# Altium PCB ICwT.PcbDoc (part 1 of 4)
Units mm, origin at the board's own origin, x right, y up, seen from the top; angles counter-clockwise.
Board outline 132 x 99.5 mm, 2 copper layers (Top Layer, Bottom Layer); 241 components, 265 nets, 1108 pads, 443 vias.
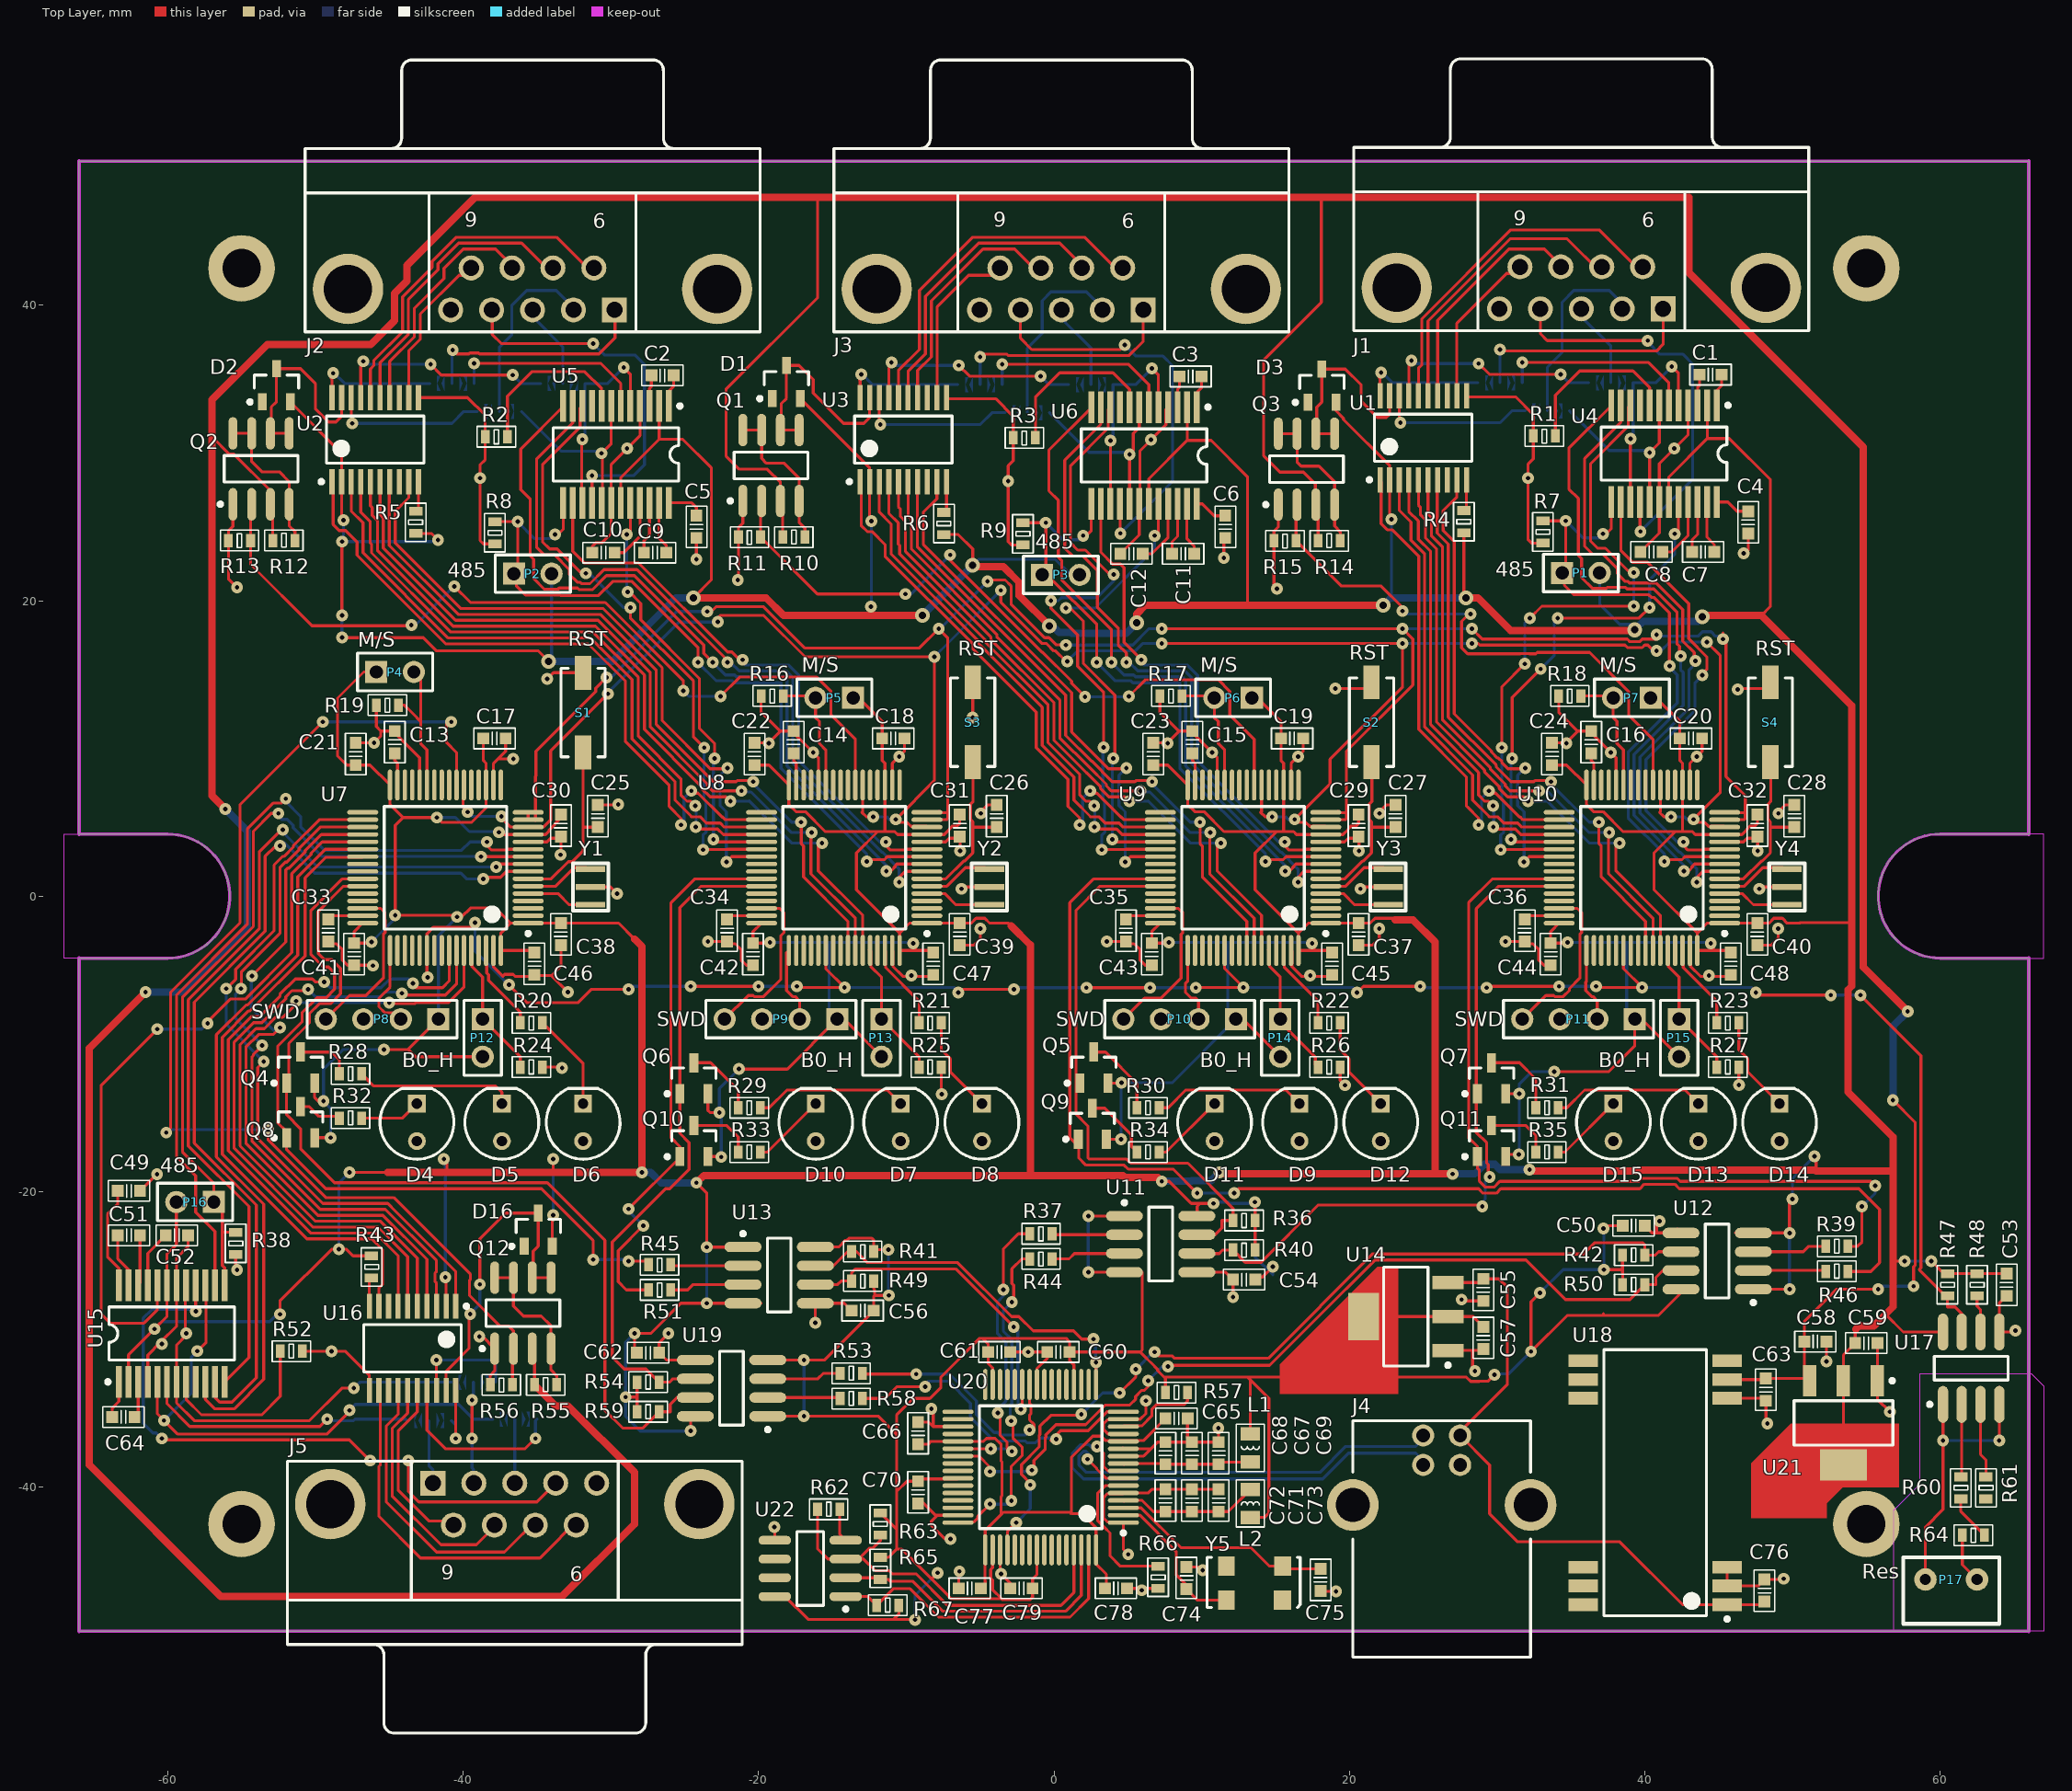
[diagram p0: Top Layer view]
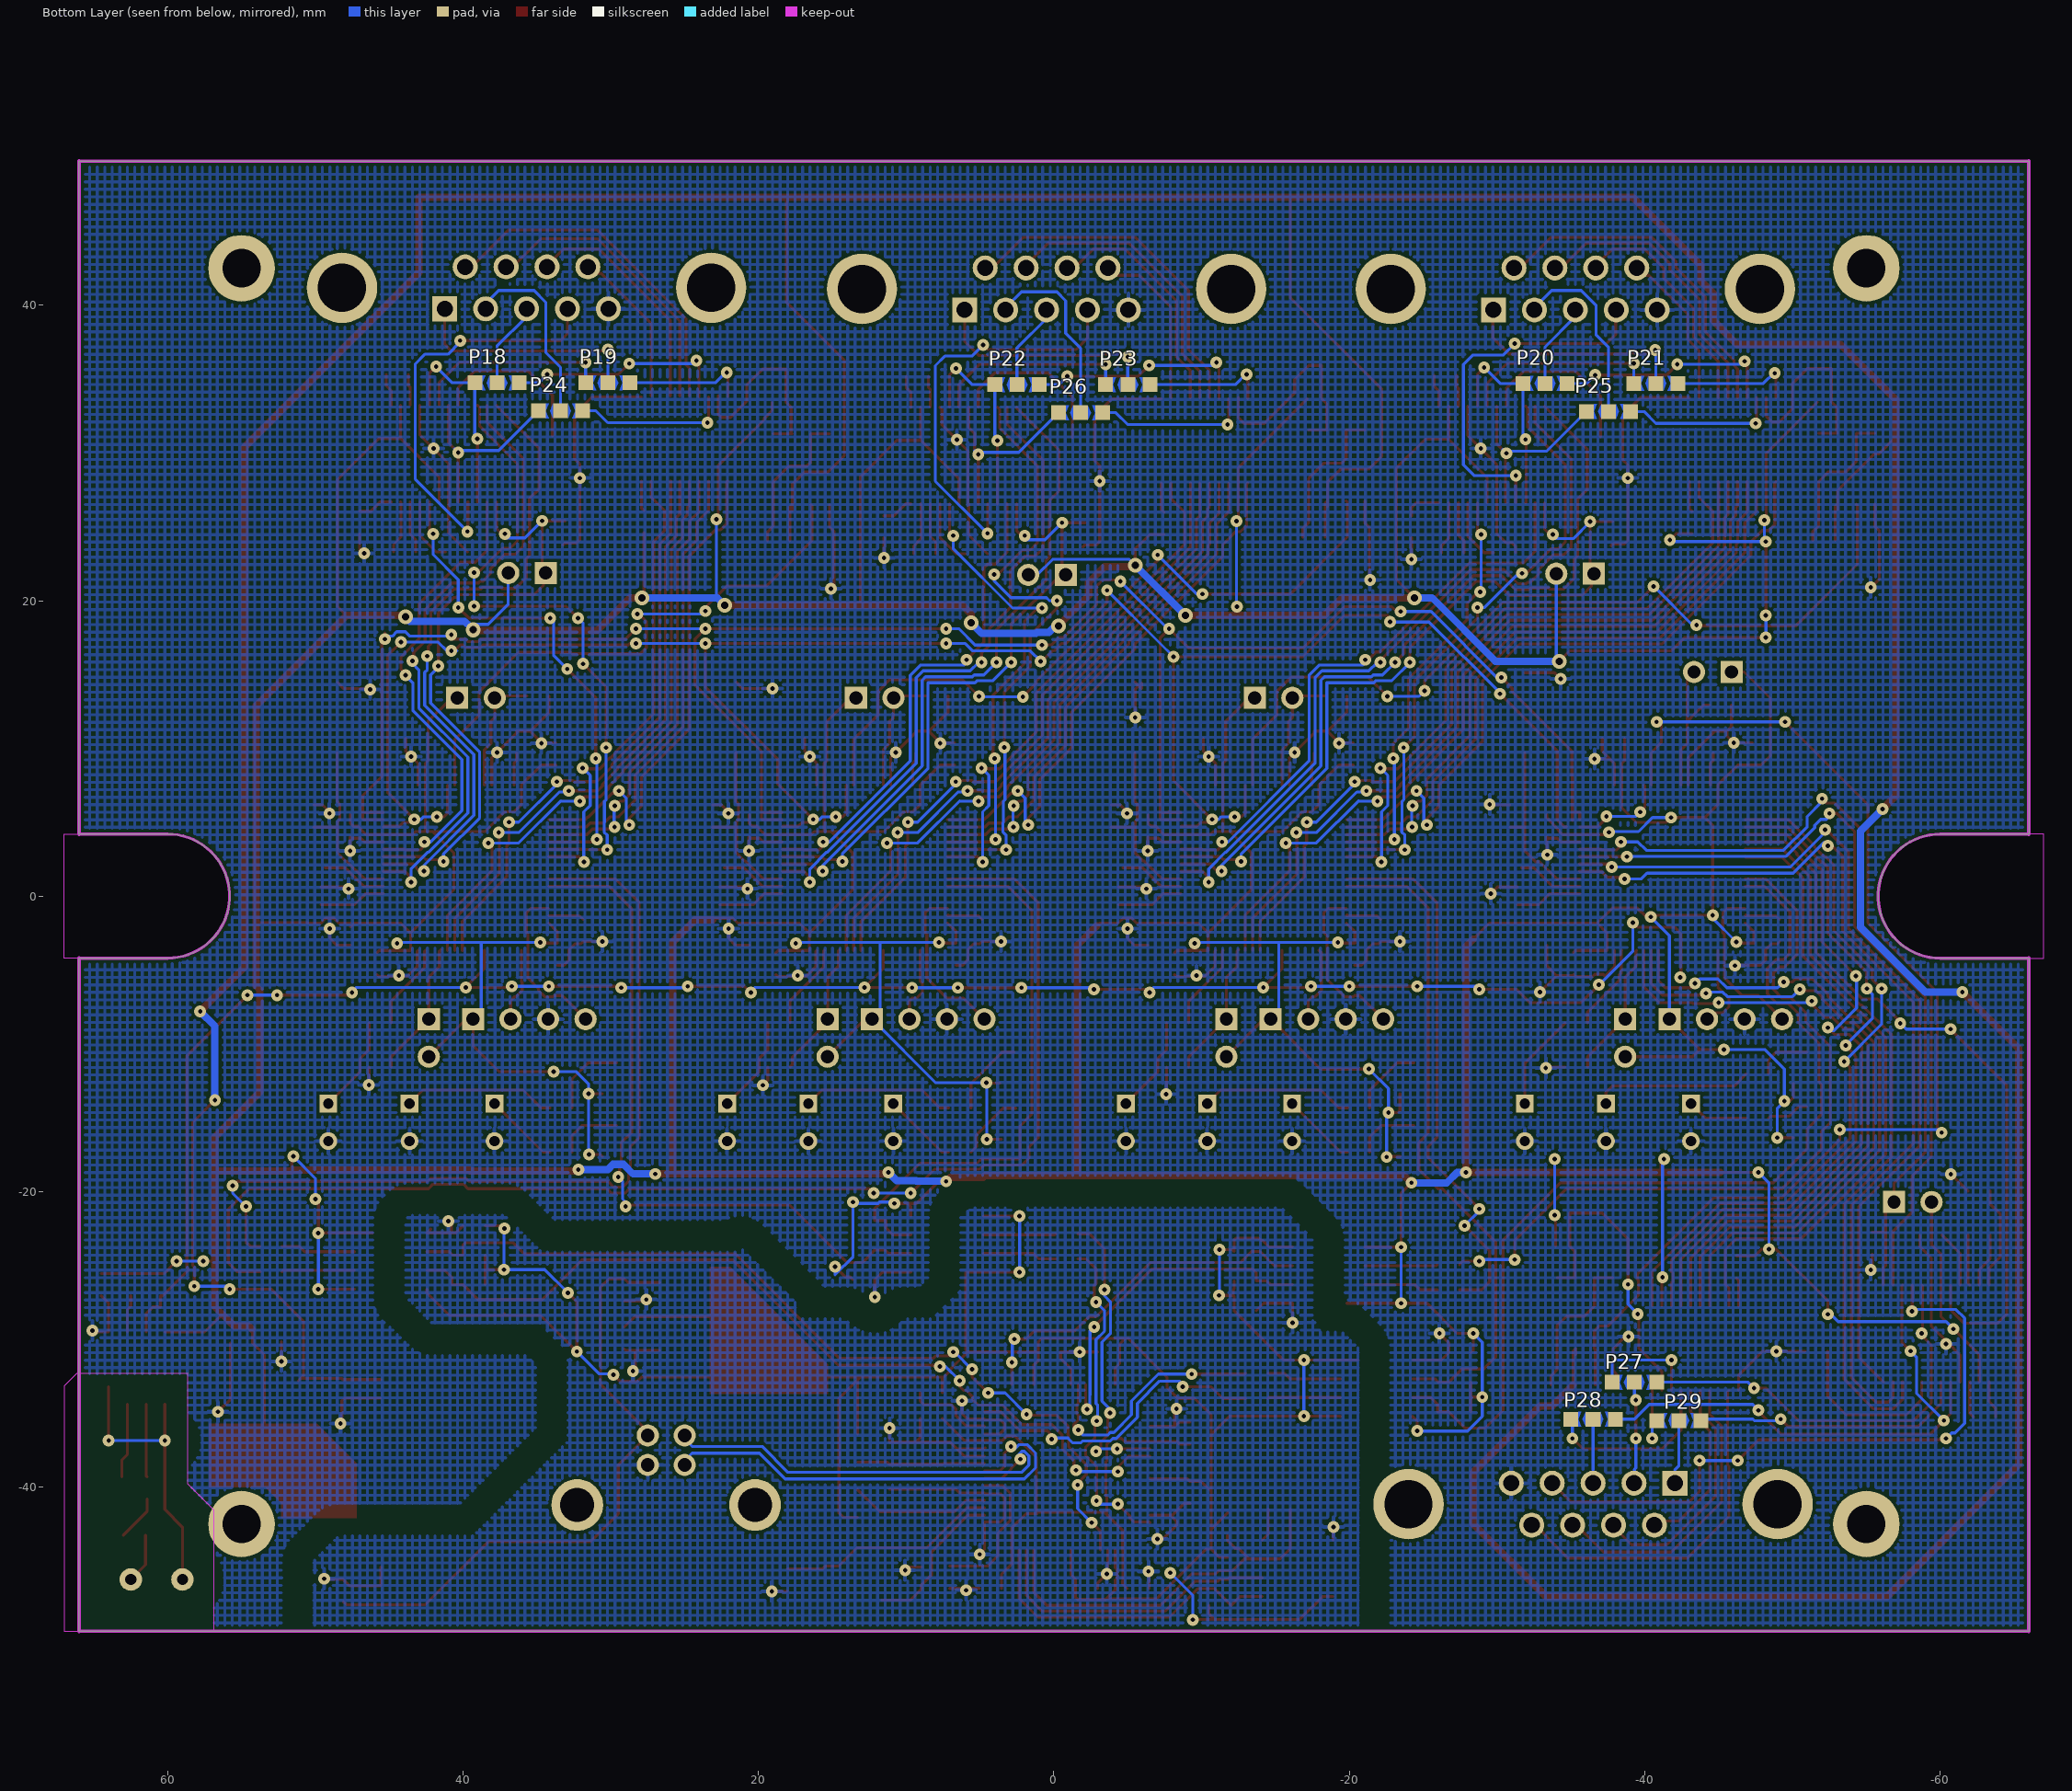
[diagram p1: Bottom Layer view, seen from below]
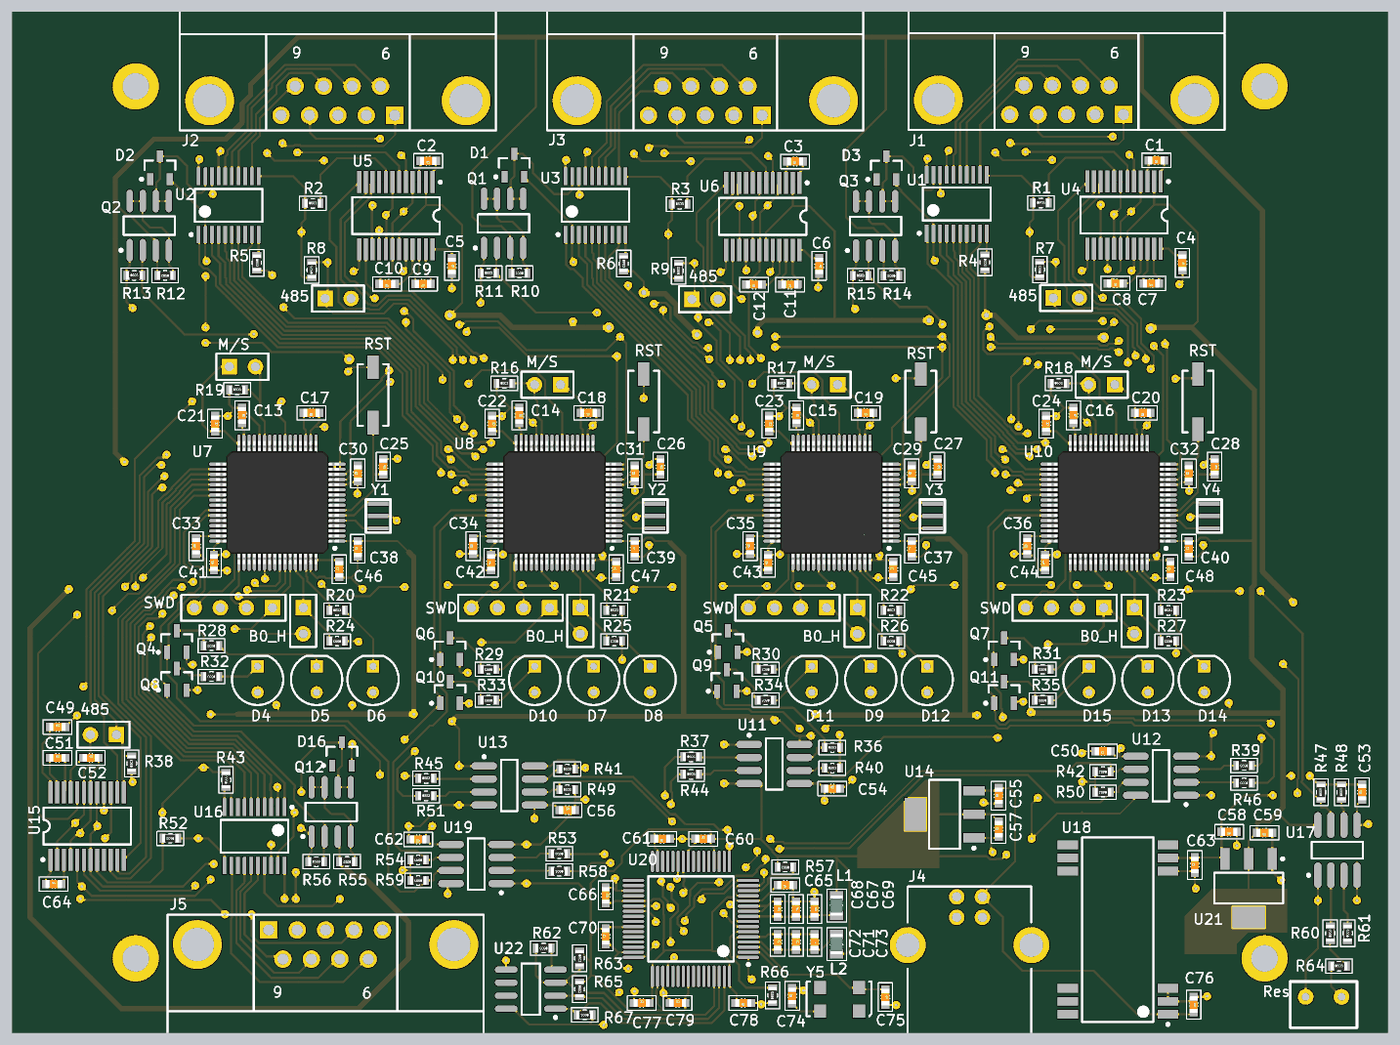
[diagram p5: 3D render of the assembled board from above, using the file's embedded part models]

## Layer stack, top to bottom
Top Solder: solder mask 0.0102, Solder Resist, Dk 3.5
Top Layer: signal copper 0.0356
Dielectric1: core 0.32, FR-4, Dk 4.8
Bottom Layer: signal copper 0.0356
Bottom Solder: solder mask 0.0102, Solder Resist, Dk 3.5

## Board outline
-66,-49.75 -66,-4.2 -60,-4.2 ccw(c-60,0) -60,4.2 -66,4.2 -66,49.75 66,49.75 66,4.2 60,4.2 60.007,4.208 ccw(c60.007,0.008) 60.007,-4.192 60,-4.2 66,-4.2 66,-49.75
cut-out: -67,-4.2 -67,4.2 -60,4.2 cw(c-60,0) -60,-4.2
cut-out: 60,-4.2 67,-4.2 67,4.2 60,4.2 60.007,4.208 ccw(c60.007,0.008)

## Design rules (kind name [scope] priority, off if disabled: settings)
Clearance Clearance_1 [InNetClass('USB_all') vs InNetClass('STM_all')] p1: gap=2
Clearance [All] p2: gap=0.2
ComponentClearance [All] p1: gap=0.254 collisioncheckmode=3 verticalgap=0.254 showdistances=TRUE
DiffPairsRouting [All] p1: maxlimit=0.254 minlimit=0.2 mostfreqgap=0.254 toplayer_minwidth=0.2 toplayer_maxwidth=0.381 toplayer_prefwidth=0.2 bottomlayer_minwidth=0.2 bottomlayer_maxwidth=0.381 bottomlayer_prefwidth=0.2 maxuncoupledlength=12.7
HoleSize [All] p1: absolutevalues=TRUE maxlimit=5 minlimit=0.025 maxpercent=80.000 minpercent=20.000
MinimumSolderMaskSliver [InComponent('U2_External_iface1','U2_External_iface2','U2_External_iface3','U2_External_iface4','U3_External_iface1','U3_External_iface2','U3_External_iface3','U3_External_iface4') vs InComponent('U2_External_iface1','U2_External_iface2','U2_External_iface3','U2_External_iface4','U3_External_iface1','U3_External_iface2','U3_External_iface3','U3_External_iface4')] p1: minsoldermaskwidth=0
MinimumSolderMaskSliver MinimumSolderMaskSliver_1 [All] p2: minsoldermaskwidth=0.1
PolygonConnect [All] p1: connectstyle=Relief reliefconductorwidth=0.254 reliefentries=4 polygonreliefangle="90 Angle" airgapwidth=0.254
RoomDefinition External_iface3 [InComponentClass('External_iface3')] p1: confinementstyle=ConfineIn formatcopy=TRUE lockcomponents=FALSE outline -15.254,37.271 -15.254,56.379 16.254,56.379 16.254,37.271 12.679,37.271 12.679,26.846 10.929,26.846 10.929,25.121 10.454,25.121 10.454,16.925 -13.204,16.925 -13.204,26.571 -14.354,26.571 -14.354,37.271
RoomDefinition External_iface4 [InComponentClass('External_iface4')] p2: confinementstyle=ConfineIn formatcopy=TRUE lockcomponents=FALSE outline 19.95,37.396 19.95,56.504 51.458,56.504 51.458,37.396 47.883,37.396 47.883,26.971 46.133,26.971 46.133,25.246 45.658,25.246 45.658,17.05 22,17.05 22,26.696 20.85,26.696 20.85,37.396
RoomDefinition External_iface2 [InComponentClass('External_iface2')] p3: confinementstyle=ConfineIn formatcopy=TRUE lockcomponents=FALSE outline -51.004,37.346 -51.004,56.454 -19.496,56.454 -19.496,37.346 -23.071,37.346 -23.071,26.921 -24.821,26.921 -24.821,25.196 -25.296,25.196 -25.296,17 -48.954,17 -48.954,26.646 -50.104,26.646 -50.104,37.346
RoomDefinition STM322 [InComponentClass('STM322')] p4: confinementstyle=ConfineIn formatcopy=TRUE lockcomponents=FALSE outline -26.875,-19.075 -1.875,-19.075 -1.875,16.925 -26.875,16.925
RoomDefinition External_iface1 [InComponentClass('External_iface1')] p5: confinementstyle=ConfineIn formatcopy=TRUE lockcomponents=FALSE outline -69.625,-18.9 -69.625,-37.95 -39.425,-37.95 -39.425,-18.9
RoomDefinition STM323 [InComponentClass('STM323')] p6: confinementstyle=ConfineIn formatcopy=TRUE lockcomponents=FALSE outline 0.125,-19.075 25.125,-19.075 25.125,16.925 0.125,16.925
RoomDefinition ICwT_main [InComponentClass('ICwT_main')] p7: confinementstyle=ConfineIn formatcopy=TRUE lockcomponents=FALSE outline 30.6,-50 57.8,-50 57.8,-28.3 30.6,-28.3
RoomDefinition TX_2 [InComponentClass('TX_2')] p8: confinementstyle=ConfineIn formatcopy=TRUE lockcomponents=FALSE outline -3.675,-27.25 18.375,-27.25 18.375,-20.25 -3.675,-20.25
RoomDefinition STM321 [InComponentClass('STM321')] p9: confinementstyle=ConfineIn formatcopy=TRUE lockcomponents=FALSE outline -53.875,-19.075 -28.875,-19.075 -28.875,16.925 -53.875,16.925
RoomDefinition "Power selector1" [InComponentClass('Power selector1')] p10: confinementstyle=ConfineIn formatcopy=TRUE lockcomponents=FALSE outline -39.41,-35.825 -32.8,-35.825 -32.8,-20.325 -39.41,-20.325
RoomDefinition U_ICwT_ft4232 [InComponentClass('U_ICwT_ft4232')] p11 off: confinementstyle=ConfineIn formatcopy=TRUE lockcomponents=FALSE outline -66.5,-49.35 -57.5,-49.35 -57.5,-45.5 -66.5,-45.5
RoomDefinition TX_1 [InComponentClass('TX_1')] p12: confinementstyle=ConfineIn formatcopy=TRUE lockcomponents=FALSE outline -10.925,-29.6 -30.425,-29.6 -30.425,-36.6 -10.925,-36.6
RoomDefinition SYNC_dec [InComponentClass('SYNC_dec')] p13: confinementstyle=ConfineIn formatcopy=TRUE lockcomponents=FALSE outline 65.795,-42.85 65.795,-20.8 58.795,-20.8 58.795,-42.85
RoomDefinition STM324 [InComponentClass('STM324')] p14: confinementstyle=ConfineIn formatcopy=TRUE lockcomponents=FALSE outline 27.125,-19.075 52.125,-19.075 52.125,16.925 27.125,16.925
RoomDefinition RX_2 [InComponentClass('RX_2')] p15: confinementstyle=ConfineIn formatcopy=TRUE lockcomponents=FALSE outline 55.8,-21 33.75,-21 33.75,-28 55.8,-28
RoomDefinition RX_1 [InComponentClass('RX_1')] p16: confinementstyle=ConfineIn formatcopy=TRUE lockcomponents=FALSE outline -29.5,-29.35 -7.45,-29.35 -7.45,-22.35 -29.5,-22.35
RoomDefinition "Power selector4" [InComponentClass('Power selector4')] p17: confinementstyle=ConfineIn formatcopy=TRUE lockcomponents=FALSE outline 13.64,21.3 20.25,21.3 20.25,36.8 13.64,36.8
RoomDefinition "Power selector3" [InComponentClass('Power selector3')] p18: confinementstyle=ConfineIn formatcopy=TRUE lockcomponents=FALSE outline -22.61,21.55 -16,21.55 -16,37.05 -22.61,37.05
RoomDefinition "Power selector2" [InComponentClass('Power selector2')] p19: confinementstyle=ConfineIn formatcopy=TRUE lockcomponents=FALSE outline -57.135,21.325 -50.525,21.325 -50.525,36.825 -57.135,36.825
RoutingVias [All] p1: holewidth=0.3 width=0.8 viastyle="Through Hole" minholewidth=0.3 minwidth=0.8 maxholewidth=0.711 maxwidth=1.27
SilkToSilkClearance [All] p1: silktosilkclearance=0.1
SilkToSolderMaskClearance SilkscreenOverComponentPads [InComponent('Y1_STM321','Y1_STM322','Y1_STM323','Y1_STM324') vs InComponent('Y1_STM321','Y1_STM322','Y1_STM323','Y1_STM324')] p1: minsilkscreentomaskgap=0 clearancetoexposedcopper=TRUE
SilkToSolderMaskClearance SilkscreenOverComponentPads_1 [IsPad] p2: minsilkscreentomaskgap=0.1 clearancetoexposedcopper=TRUE
SolderMaskExpansion [All] p1: expansion=0.1
Width [All] p1: maxlimit=1 minlimit=0.2 preferedwidth=0.2
23 further rules are at their usual default settings.

## Classes and differential pairs
net class OP_side2: 3.3VDC_External_iface1 EXT_SYNC FT_RXD1 FT_RXD2 FT_RXD3 FT_RXD4 FT_VCC33 GND_STM321 NetR17_1 RXD1 RXD2 RXD3 RXD4 UGND
net class OP_side1: 3.3VDC_External_iface1 FT_TXD1 FT_TXD2 FT_TXD3 FT_TXD4 FT_VCC33 NetP1_1 NetR4_2 NetR7_1 NetR7_2 NetR8_2 NetR10_2 NetR15_2 NetR19_2 NetR23_2 NetR24_2 NetR25_2 NetR30_2 NetR31_2 TXD1 TXD2 TXD3 TXD4
net class USB_all: EECLK EECS EEDATA FT_RXD1 FT_RXD2 FT_RXD3 FT_RXD4 FT_TXD1 FT_TXD2 FT_TXD3 FT_TXD4 FT_VCC18 FT_VCC33 FT_VPHY FT_VPLL NetC2_1 NetC4_1 NetP1_1 NetP1_2 NetR2_2 NetR4_2 NetR6_1 NetR7_1 NetR11_1 NetU6_18 NetU6_19 NetU6_21 NetU6_22 NetU6_23 NetU6_24 NetU6_28 NetU6_29 NetU6_30 NetU6_32 NetU6_33 NetU6_34 NetU6_36 NetU6_40 NetU6_41 NetU6_43 NetU6_44 NetU6_45 NetU6_46 NetU6_53 NetU6_54 NetU6_55 NetU6_57 NetU6_58 NetU6_59 NetU6_60 NetU7_6 NetU7_7 NetU8_28 UGND USB_N USB_P VBUS
net class STM_all: 3.3VDC_External_iface1 /SHDN_External_iface1 /SHDN_External_iface2 /SHDN_External_iface3 /SHDN_External_iface4 A(RX+)_External_iface1 A(RX+)_External_iface2 A(RX+)_External_iface3 A(RX+)_External_iface4 B(RX-)_External_iface1 B(RX-)_External_iface2 B(RX-)_External_iface3 B(RX-)_External_iface4 CLK_GEN_STM321 CS0_EX_External_iface1 CS0_EX_External_iface2 CS0_EX_External_iface3 CS0_EX_External_iface4 CS0_External_iface1 CS0_External_iface2 CS0_External_iface3 CS0_External_iface4 CS1_EX_External_iface1 CS1_EX_External_iface2 CS1_EX_External_iface3 CS1_EX_External_iface4 CS1_External_iface1 CS1_External_iface2 CS1_External_iface3 CS1_External_iface4 CS2_EX_External_iface1 CS2_EX_External_iface2 CS2_EX_External_iface3 CS2_EX_External_iface4 CS2_External_iface1 CS2_External_iface2 CS2_External_iface3 CS2_External_iface4 DSUB1_External_iface1 DSUB1_External_iface2 DSUB1_External_iface3 DSUB1_External_iface4 DSUB2_External_iface1 DSUB2_External_iface2 DSUB2_External_iface3 DSUB2_External_iface4 EXT_SYNC FAST_External_iface1 FAST_External_iface2 FAST_External_iface3 FAST_External_iface4 GND_STM321 HDPLX_External_iface1 HDPLX_External_iface2 HDPLX_External_iface3 HDPLX_External_iface4 MISO_EX_External_iface1 MISO_EX_External_iface2 MISO_EX_External_iface3 MISO_EX_External_iface4 MISO_External_iface1 MISO_External_iface2 MISO_External_iface3 MISO_External_iface4 MOSI_EX_External_iface1 MOSI_EX_External_iface2 MOSI_EX_External_iface3 MOSI_EX_External_iface4 MOSI_External_iface1 MOSI_External_iface2 MOSI_External_iface3 MOSI_External_iface4 NetC16_1 NetC16_2 NetC28_1 NetC28_2 NetC29_1 NetC31_1 NetC44_2 NetC45_2 NetC46_2 NetC47_2 NetC60_2 NetC61_2 NetC62_2 NetC63_2 NetC68_1 NetC68_2 NetC69_1 NetC70_1 NetC70_2 NetC71_1 NetC72_1 NetC72_2 NetC73_1 NetC74_1 NetC75_1 NetC76_1 NetC77_1 NetC77_2 NetC78_1 NetC78_2 NetC79_1 NetC79_2 NetD1_3 NetD2_1 NetD3_1 NetD4_1 NetD5_1 NetD6_1 NetD7_1 NetD8_1 NetD9_1 NetD10_1 NetD11_1 NetD12_1 NetD13_1 NetD14_3 NetD15_3 NetD16_3 NetJ1_1 NetJ1_2 NetJ1_3 NetJ3_1 NetJ3_2 NetJ3_3 NetJ4_1 NetJ4_2 NetJ4_3 NetJ5_1 NetJ5_2 NetJ5_3 NetP3_1 NetP4_1 NetP5_1 NetP6_1 NetP11_2 NetP12_2 NetP13_2 NetP14_2 NetQ1_2 NetQ1_4 NetQ5_STM321_3 NetQ5_STM322_3 NetQ5_STM323_3 NetQ5_STM324_3 NetQ9_STM321_3 NetQ9_STM322_3 NetQ9_STM323_3 NetQ9_STM324_3 NetQ10_2 NetQ10_4 NetQ11_2 NetQ11_4 NetQ12_2 NetQ12_4 NetR16_2 NetR17_1 NetR22_1 NetR45_1 NetR46_1 NetR47_1 NetR48_1 NetR62_1 NetR63_1 NetR64_1 NetR65_2 NetR66_2 NetR67_2 NetU1_STM321_2 NetU1_STM321_3 NetU1_STM321_4 NetU1_STM321_20 NetU1_STM321_21 NetU1_STM321_24 NetU1_STM321_25 NetU1_STM321_26 NetU1_STM321_29 NetU1_STM321_30 NetU1_STM321_33 NetU1_STM321_40 NetU1_STM321_41 NetU1_STM321_44 NetU1_STM321_45 NetU1_STM321_50 NetU1_STM321_51 NetU1_STM321_52 NetU1_STM321_53 NetU1_STM321_55 NetU1_STM321_56 NetU1_STM321_61 NetU1_STM321_62 NetU1_STM322_2 NetU1_STM322_3 NetU1_STM322_4 NetU1_STM322_20 NetU1_STM322_21 NetU1_STM322_24 NetU1_STM322_25 NetU1_STM322_26 NetU1_STM322_29 NetU1_STM322_30 NetU1_STM322_33 NetU1_STM322_40 NetU1_STM322_41 NetU1_STM322_44 NetU1_STM322_45 NetU1_STM322_50 NetU1_STM322_51 NetU1_STM322_52 NetU1_STM322_53 NetU1_STM322_55 NetU1_STM322_56 NetU1_STM322_61 NetU1_STM322_62 NetU1_STM323_2 NetU1_STM323_3 NetU1_STM323_4 NetU1_STM323_20 NetU1_STM323_21 NetU1_STM323_24 NetU1_STM323_25 NetU1_STM323_26 NetU1_STM323_29 NetU1_STM323_30 NetU1_STM323_33 NetU1_STM323_40 NetU1_STM323_41 NetU1_STM323_44 NetU1_STM323_45 NetU1_STM323_50 NetU1_STM323_51 NetU1_STM323_52 NetU1_STM323_53 NetU1_STM323_55 NetU1_STM323_56 NetU1_STM323_61 NetU1_STM323_62 NetU1_STM324_2 NetU1_STM324_3 NetU1_STM324_4 NetU1_STM324_20 NetU1_STM324_21 NetU1_STM324_24 NetU1_STM324_25 NetU1_STM324_26 NetU1_STM324_29 NetU1_STM324_30 NetU1_STM324_33 NetU1_STM324_40 NetU1_STM324_41 NetU1_STM324_44 NetU1_STM324_45 NetU1_STM324_50 NetU1_STM324_51 NetU1_STM324_52 NetU1_STM324_53 NetU1_STM324_55 NetU1_STM324_56 NetU1_STM324_61 NetU1_STM324_62 NetU2_External_iface1_9 NetU2_External_iface2_9 NetU2_External_iface3_9 NetU2_External_iface4_9 NetU3_External_iface1_8 NetU3_External_iface1_13 NetU3_External_iface2_8 NetU3_External_iface2_13 NetU3_External_iface3_8 NetU3_External_iface3_13 NetU3_External_iface4_8 NetU3_External_iface4_13 NetU7_9 NetU13_5 NetU13_6 NetU14_5 NetU14_6 NetU14_39 NetU15_5 NetU15_6 NetU15_39 NetU16_5 NetU16_6 NetU16_39 "RS485; /RS232_External_iface1" "RS485; /RS232_External_iface2" "RS485; /RS232_External_iface3" "RS485; /RS232_External_iface4" RST_GEN_STM321 RST_STM321 RST_STM322 RST_STM323 RST_STM324 "RX(TO STM)_External_iface1" "RX(TO STM)_External_iface2" "RX(TO STM)_External_iface3" "RX(TO STM)_External_iface4" RXD1 RXD2 RXD3 RXD4 SCK_EX_External_iface1 SCK_EX_External_iface2 SCK_EX_External_iface3 SCK_EX_External_iface4 SCK_External_iface1 SCK_External_iface2 SCK_External_iface3 SCK_External_iface4 SWDCLK_STM321 SWDCLK_STM322 SWDCLK_STM323 SWDCLK_STM324 SWDIO_STM321 SWDIO_STM322 SWDIO_STM323 SWDIO_STM324 SYNC_EX_External_iface1 SYNC_EX_External_iface2 SYNC_EX_External_iface3 SYNC_EX_External_iface4 "TX(FROM STM)_External_iface1" "TX(FROM STM)_External_iface2" "TX(FROM STM)_External_iface3" "TX(FROM STM)_External_iface4" TXD1 TXD2 TXD3 TXD4 VCC5
component class External_iface1: C28 C46 C49 C64 J1 P2 P21 P28 P29 R10_External_iface1 R38 R43 R52 U14 U16
component class External_iface2: C9 C10 C75 C78 J2 P2 P20 P21 P25 R10_External_iface2 R60 R63 R66 U2 U5
component class External_iface3: C3 C11 C12 C77 J2 P12 P20 P24 P25 R6 R10_External_iface3 R59 R65 U3 U17
component class External_iface4: C4 C7 C8 C76 J1 P17 P24 P28 P29 R4 R7 R10_External_iface4 R67 U18 U21
component class ICwT_main: C16 C58 C59 P17 R4 U18 U21
component class "Power selector1": D1 Q1 R55 R56
component class "Power selector2": D2 Q2 R12 R13
component class "Power selector3": D1 Q1 R11 R13
component class "Power selector4": D3 Q3 R53 R54
component class RX_1: C56 R13_RX_1 R14_RX_1 R20 R24 R49 R51 U13
component class RX_2: C50 R13_RX_2 R14_RX_2 R16 R39 R42 R49 U12
component class STM321: C16 C28 C30 C33 C38 C44 C46 C57 C67 D4 D14 D15 P9 P12 P13 Q4 Q8 R20 R24 R28 R32 R51 S3 U16 Y4
component class STM322: C18 C19 C33 C36 C37 C45 C49 C53 C59 D7 D14 D15 P5 P9 P13 Q6 Q10 R16 R33 R40 R44 R49 S3 U8 Y2
component class STM323: C19 C29 C30 C37 C38 C45 C54 C58 C65 D9 D14 D15 P5 P13 P15 Q5 Q9 R26 R30 R34 R43 R49 S2 U14 Y3
component class STM324: C16 C24 C28 C30 C33 C36 C38 C46 C61 D13 D14 D15 P5 P9 P15 Q7 Q11 R35 R37 R38 R47 R49 S3 U13 Y4
component class SYNC_dec: C53 R13_SYNC_dec R14_SYNC_dec R47 R49 R60 R61 U17
component class TX_1: C65 R13 R13_TX_1 R14_TX_1 R53 R54 R59 U19
component class TX_2: C54 R13_TX_2 R14_TX_2 R32 R37 R40 R44 U12
component class U_ICwT_ft4232: C1 C6 C7 C8 C9 C10 C11 C12 C13 C19 C28 C57 C61 C65 C67 C75 C76 C77 C78 J4 L1 L2 R6 R54 R63 R65 R66 R67 U2 U14 U22 Y4
net class FT_RXD[1..4]: FT_RXD1 FT_RXD2 FT_RXD3 FT_RXD4
net class FT_TXD[1..4]: FT_TXD1 FT_TXD2 FT_TXD3 FT_TXD4
net class RXD[1..4]: RXD1 RXD2 RXD3 RXD4
net class TXD[1..4]: TXD1 TXD2 TXD3 TXD4
channel class decoupling: RX_1 RX_2 SYNC_dec TX_1 TX_2
channel class module: module1 module2 module3 module4
channel class Power: "Power selector1" "Power selector2" "Power selector3" "Power selector4"
channel class RS_iface: External_iface1 External_iface2 External_iface3 External_iface4
channel class STM32: STM321 STM322 STM323 STM324
differential pair USB: +USB_P -USB_N

## Components (designator, comment, footprint, x,y, rotation, side; value= is the part's Value field where it differs from the comment)
C1 "Cap" C_0603 44.454,35.3 r180 top (schematic designator C64)
C2 "Cap" C_0603 -26.5,35.25 r180 top (schematic designator C64)
C3 "Cap" C_0603 9.25,35.175 r180 top (schematic designator C64)
C4 "Cap" C_0603 47,25.3 r270 top (schematic designator C57)
C5 "Cap" C_0603 -24.2,25 r270 top (schematic designator C57)
C6 "Cap" C_0603 11.6,25 r270 top (schematic designator C57)
C7 "Cap" C_0603 43.954,23.3 r180 top (schematic designator C40)
C8 "Cap" C_0603 40.454,23.3 r180 top
C9 "Cap" C_0603 -27,23.25 r180 top (schematic designator C40)
C10 "Cap" C_0603 -30.5,23.25 r180 top (schematic designator C8)
C11 "Cap" C_0603 8.75,23.175 r180 top (schematic designator C40)
C12 "Cap" C_0603 5.25,23.175 r180 top (schematic designator C8)
C13 "Cap" C_0603 -44.625,10.425 r270 top (schematic designator C44)
C14 "Cap" C_0603 -17.625,10.425 r270 top (schematic designator C44)
C15 "Cap" C_0603 9.375,10.425 r270 top (schematic designator C44)
C16 "Cap" C_0603 36.375,10.425 r270 top (schematic designator C44)
C17 "Cap" C_0603 -37.875,10.675 r180 top (schematic designator C7)
C18 "Cap" C_0603 -10.875,10.675 r180 top (schematic designator C7)
C19 "Cap" C_0603 16.125,10.675 r180 top (schematic designator C7)
C20 "Cap" C_0603 43.125,10.675 r180 top (schematic designator C7)
C21 "Cap" C_0603 -47.275,9.625 r270 top (schematic designator C33)
C22 "Cap" C_0603 -20.275,9.625 r270 top (schematic designator C33)
C23 "Cap" C_0603 6.725,9.625 r270 top (schematic designator C33)
C24 "Cap" C_0603 33.725,9.625 r270 top (schematic designator C33)
C25 "Cap" C_0603 -30.875,5.425 r270 top (schematic designator C11)
C26 "Cap" C_0603 -3.875,5.425 r270 top (schematic designator C11)
C27 "Cap" C_0603 23.125,5.425 r270 top (schematic designator C11)
C28 "Cap" C_0603 50.125,5.425 r270 top (schematic designator C11)
C29 "Cap" C_0603 20.625,4.775 r90 top (schematic designator C48)
C30 "Cap" C_0603 -33.375,4.775 r90 top (schematic designator C48)
C31 "Cap" C_0603 -6.375,4.775 r90 top (schematic designator C48)
C32 "Cap" C_0603 47.625,4.775 r90 top (schematic designator C48)
C33 "Cap" C_0603 -49.125,-2.325 r90 top (schematic designator C32)
C34 "Cap" C_0603 -22.125,-2.325 r90 top (schematic designator C32)
C35 "Cap" C_0603 4.875,-2.325 r90 top (schematic designator C32)
C36 "Cap" C_0603 31.875,-2.325 r90 top (schematic designator C32)
C37 "Cap" C_0603 20.625,-2.575 r90 top (schematic designator C23)
C38 "Cap" C_0603 -33.375,-2.575 r90 top (schematic designator C23)
C39 "Cap" C_0603 -6.375,-2.575 r90 top (schematic designator C23)
C40 "Cap" C_0603 47.625,-2.575 r90 top (schematic designator C23)
C41 "Cap" C_0603 -47.375,-3.925 r90 top (schematic designator C56)
C42 "Cap" C_0603 -20.375,-3.925 r90 top (schematic designator C56)
C43 "Cap" C_0603 6.625,-3.925 r90 top (schematic designator C56)
C44 "Cap" C_0603 33.625,-3.925 r90 top (schematic designator C56)
C45 "Cap" C_0603 18.825,-4.575 r90 top (schematic designator C28)
C46 "Cap" C_0603 -35.175,-4.575 r90 top (schematic designator C28)
C47 "Cap" C_0603 -8.175,-4.575 r90 top (schematic designator C28)
C48 "Cap" C_0603 45.825,-4.575 r90 top (schematic designator C28)
C49 "Cap" C_0603 -62.625,-19.95 r0 top (schematic designator C57)
C50 "Cap" C_0603 39.25,-22.3 r180 top (schematic designator C6)
C51 "Cap" C_0603 -62.625,-22.95 r0 top (schematic designator C40)
C52 "Cap" C_0603 -59.375,-22.95 r0 top (schematic designator C8)
C53 "Cap" C_0603 64.495,-26.3 r90 top (schematic designator C6)
C54 "Cap" C_0603 12.875,-25.95 r0 top (schematic designator C6)
C55 "Cap" C_0603 29.075,-26.65 r90 top (schematic designator C15)
C56 "Cap" C_0603 -12.95,-28.05 r0 top (schematic designator C6)
C57 "Cap" C_0603 29.075,-29.9 r90 top (schematic designator C52)
C58 "Cap" C_0603 51.55,-30.15 r180 top (schematic designator C3)
C59 "Cap" C_0603 55,-30.25 r180 top (schematic designator C17)
C60 "Cap" C_0603 0.3,-30.85 r0 top (schematic designator C59)
C61 "Cap" C_0603 -3.7,-30.85 r180 top (schematic designator C58)
C62 "Cap" C_0603 -27.475,-30.9 r180 top (schematic designator C6)
C63 "Cap" C_0603 48.2,-33.4 r90 top (schematic designator C41)
C64 "Cap" C_0603 -63,-35.25 r0 top
C65 "Cap" C_0603 8.3,-35.35 r180 top (schematic designator C76)
C66 "Cap" C_0603 -9.2,-36.35 r270 top
C67 "Cap" C_0603 9.35,-37.7 r270 top
C68 "Cap" C_0603 7.55,-37.7 r270 top (schematic designator C12)
C69 "Cap" C_0603 11.15,-37.7 r270 top (schematic designator C2)
C70 "Cap" C_0603 -9.2,-40.35 r90 top (schematic designator C16)
C71 "Cap" C_0603 9.35,-40.9 r270 top (schematic designator C49)
C72 "Cap" C_0603 7.55,-40.9 r270 top (schematic designator C29)
C73 "Cap" C_0603 11.15,-40.9 r270 top (schematic designator C34)
C74 "Cap" C_0603 8.975,-46.15 r90 top (schematic designator C24)
C75 "Cap" C_0603 18.05,-46.275 r270 top (schematic designator C45)
C76 "Cap" C_0603 48.1,-47 r270 top (schematic designator C1)
C77 "Cap" C_0603 -5.7,-46.85 r0 top (schematic designator C65)
C78 "Cap" C_0603 4.2,-46.85 r180 top (schematic designator C19)
C79 "Cap" C_0603 -2.2,-46.85 r0 top (schematic designator C35)
D1 "HSMS-8101-BLKG" SOT-23_N -18.11,34.8 r90 top
D2 "HSMS-8101-BLKG" SOT-23_N -52.635,34.575 r90 top (schematic designator D1)
D3 "HSMS-8101-BLKG" SOT-23_N 18.14,34.55 r90 top (schematic designator D1)
D4 "3mm led yellow" "Led, 2.54mm pitch" -43.125,-16.575 r90 top (schematic designator D2)
D5 "3mm red" "Led, 2.54mm pitch" -37.375,-16.575 r90 top (schematic designator D3)
D6 "3mm green" "Led, 2.54mm pitch" -31.875,-16.575 r90 top (schematic designator D13)
D7 "3mm red" "Led, 2.54mm pitch" -10.375,-16.575 r90 top (schematic designator D3)
D8 "3mm green" "Led, 2.54mm pitch" -4.875,-16.575 r90 top (schematic designator D13)
D9 "3mm red" "Led, 2.54mm pitch" 16.625,-16.575 r90 top (schematic designator D3)
D10 "3mm led yellow" "Led, 2.54mm pitch" -16.125,-16.575 r90 top (schematic designator D2)
D11 "3mm led yellow" "Led, 2.54mm pitch" 10.875,-16.575 r90 top (schematic designator D2)
D12 "3mm green" "Led, 2.54mm pitch" 22.125,-16.575 r90 top (schematic designator D13)
D13 "3mm red" "Led, 2.54mm pitch" 43.625,-16.575 r90 top (schematic designator D3)
D14 "3mm green" "Led, 2.54mm pitch" 49.125,-16.575 r90 top (schematic designator D13)
D15 "3mm led yellow" "Led, 2.54mm pitch" 37.875,-16.575 r90 top (schematic designator D2)
D16 "HSMS-8101-BLKG" SOT-23_N -34.91,-22.575 r90 top (schematic designator D1)
J1 "DSUB Male" DSUB1.385-2H9M 35.704,50.675 r0 top (schematic designator J2)
J2 "DSUB Male" DSUB1.385-2H9M -35.3,50.6 r0 top
J3 "DSUB Male" DSUB1.385-2H9M 0.5,50.6 r0 top (schematic designator J2)
J4 "USB" USBB 26.25,-36.5 r0 top (schematic designator J3)
J5 "DSUB Male" DSUB1.385-2H9M -36.5,-50.65 r180 top (schematic designator J2)
L1 "Inductor" L_0805 13.3,-37.35 r270 top
L2 "Inductor" L_0805 13.3,-41.1 r90 top
P1 "485" HDR1X2 34.404,21.875 r0 top (schematic designator P14)
P2 "485" HDR1X2 -36.55,21.825 r0 top (schematic designator P14)
P3 "485" HDR1X2 -0.8,21.75 r0 top (schematic designator P14)
P4 "M/S" HDR1X2 -45.875,15.175 r0 top (schematic designator P10)
P5 "M/S" HDR1X2 -13.6,13.425 r180 top (schematic designator P10)
P6 "M/S" HDR1X2 13.4,13.425 r180 top (schematic designator P10)
P7 "M/S" HDR1X2 40.4,13.425 r180 top (schematic designator P10)
P8 "SWD" HDR1X4 -41.675,-8.325 r180 top (schematic designator P2)
P9 "SWD" HDR1X4 -14.675,-8.325 r180 top (schematic designator P2)
P10 "SWD" HDR1X4 12.325,-8.325 r180 top (schematic designator P2)
P11 "SWD" HDR1X4 39.325,-8.325 r180 top (schematic designator P2)
P12 "B0_H" HDR1X2 -38.675,-8.325 r270 top (schematic designator P6)
P13 "B0_H" HDR1X2 -11.675,-8.325 r270 top (schematic designator P6)
P14 "B0_H" HDR1X2 15.325,-8.325 r270 top (schematic designator P6)
P15 "B0_H" HDR1X2 42.325,-8.325 r270 top (schematic designator P6)
P16 "485" HDR1X2 -56.875,-20.7 r180 top (schematic designator P14)
P17 "Res" PAS 59,-46.25 r270 top (schematic designator P15)
P18 "SWI_CONN" SW_SPDT 37.704,34.75 r180 bottom net-tie (schematic designator P7)
P19 "SWI_CONN" SW_SPDT 30.204,34.75 r180 bottom net-tie (schematic designator P11)
P20 "SWI_CONN" SW_SPDT -33.25,34.7 r180 bottom net-tie (schematic designator P7)
P21 "SWI_CONN" SW_SPDT -40.75,34.7 r180 bottom net-tie (schematic designator P11)
P22 "SWI_CONN" SW_SPDT 2.5,34.625 r180 bottom net-tie (schematic designator P7)
P23 "SWI_CONN" SW_SPDT -5,34.625 r180 bottom net-tie (schematic designator P11)
P24 "SWI_CONN" SW_SPDT 33.404,32.85 r180 bottom net-tie (schematic designator P3)
P25 "SWI_CONN" SW_SPDT -37.55,32.8 r180 bottom net-tie (schematic designator P3)
P26 "SWI_CONN" SW_SPDT -1.8,32.725 r180 bottom net-tie (schematic designator P3)
P27 "SWI_CONN" SW_SPDT -39.3,-32.9 r0 bottom net-tie (schematic designator P3)
P28 "SWI_CONN" SW_SPDT -36.5,-35.4 r0 bottom net-tie (schematic designator P7)
P29 "SWI_CONN" SW_SPDT -42.3,-35.5 r0 bottom net-tie (schematic designator P11)
Q1 "IRF7307" SO-8_N -19.155,29.15 r90 top
Q2 "IRF7307" SO-8_N -53.68,28.925 r90 top (schematic designator Q1)
Q3 "IRF7307" SO-8_N 17.095,28.9 r90 top (schematic designator Q1)
Q4 "BSS84" SOT23_N -51,-11.6 r90 top (schematic designator Q5)
Q5 "BSS84" SOT23_N 2.7,-11.6 r90 top
Q6 "BSS84" SOT23_N -24.375,-12.325 r90 top (schematic designator Q5)
Q7 "BSS84" SOT23_N 29.625,-12.325 r90 top (schematic designator Q5)
Q8 "BSS84" SOT23_N -51,-15.3 r90 top (schematic designator Q9)
Q9 "BSS84" SOT23_N 2.6,-15.4 r90 top
Q10 "BSS84" SOT23_N -24.375,-16.575 r90 top (schematic designator Q9)
Q11 "BSS84" SOT23_N 29.625,-16.575 r90 top (schematic designator Q9)
Q12 "IRF7307" SO-8_N -35.955,-28.225 r90 top (schematic designator Q1)
R1 "Res" R_0603 33.204,31.15 r0 top (schematic designator R64)
R2 "Res" R_0603 -37.75,31.1 r0 top (schematic designator R64)
R3 "Res" R_0603 -2,31.025 r0 top (schematic designator R64)
R4 "Res" R_0603 27.754,25.35 r270 top (schematic designator R60)
R5 "Res" R_0603 -43.2,25.3 r270 top (schematic designator R60)
R6 "Res" R_0603 -7.45,25.225 r270 top (schematic designator R60)
R7 "Res" R_0603 33.104,24.65 r90 top (schematic designator R28)
R8 "Res" R_0603 -37.85,24.6 r90 top (schematic designator R28)
R9 "Res" R_0603 -2.1,24.525 r90 top (schematic designator R28)
R10 "Res" R_0603 -17.61,24.3 r180 top (schematic designator R6)
R11 "Res" R_0603 -20.61,24.3 r0 top (schematic designator R48)
R12 "Res" R_0603 -52.135,24.075 r180 top (schematic designator R6)
R13 "Res" R_0603 -55.135,24.075 r0 top (schematic designator R48)
R14 "Res" R_0603 18.64,24.05 r180 top (schematic designator R6)
R15 "Res" R_0603 15.64,24.05 r0 top (schematic designator R48)
R16 "Res" R_0603 -19.075,13.55 r0 top (schematic designator R56)
R17 "Res" R_0603 7.925,13.55 r0 top (schematic designator R56)
R18 "Res" R_0603 34.925,13.55 r0 top (schematic designator R56)
R19 "Res" R_0603 -45.125,12.925 r0 top (schematic designator R56)
R20 "Res" R_0603 -35.375,-8.575 r0 top (schematic designator R18)
R21 "Res" R_0603 -8.375,-8.575 r0 top (schematic designator R18)
R22 "Res" R_0603 18.625,-8.575 r0 top (schematic designator R18)
R23 "Res" R_0603 45.625,-8.575 r0 top (schematic designator R18)
R24 "Res" R_0603 -35.375,-11.575 r180 top (schematic designator R52)
R25 "Res" R_0603 -8.375,-11.575 r180 top (schematic designator R52)
R26 "Res" R_0603 18.625,-11.575 r180 top (schematic designator R52)
R27 "Res" R_0603 45.625,-11.575 r180 top (schematic designator R52)
R28 "Res" R_0603 -47.625,-12.025 r180 top (schematic designator R13)
R29 "Res" R_0603 -20.625,-14.325 r180 top (schematic designator R13)
R30 "Res" R_0603 6.375,-14.325 r180 top (schematic designator R13)
R31 "Res" R_0603 33.375,-14.325 r180 top (schematic designator R13)
R32 "Res" R_0603 -47.625,-15.025 r180 top (schematic designator R44)
R33 "Res" R_0603 -20.625,-17.325 r180 top (schematic designator R44)
R34 "Res" R_0603 6.375,-17.325 r180 top (schematic designator R44)
R35 "Res" R_0603 33.375,-17.325 r180 top (schematic designator R44)
R36 "Res" R_0603 12.875,-21.95 r0 top (schematic designator R4)
R37 "Res" R_0603 -0.875,-22.85 r0 top (schematic designator R36)
R38 "Res" R_0603 -55.4,-23.5 r90 top (schematic designator R28)
R39 "Res" R_0603 53,-23.7 r180 top (schematic designator R3)
R40 "Res" R_0603 12.875,-23.95 r0 top (schematic designator R7)
R41 "Res" R_0603 -12.95,-24.05 r0 top (schematic designator R4)
R42 "Res" R_0603 39.25,-24.3 r180 top (schematic designator R7)
R43 "Res" R_0603 -46.2,-25.1 r90 top (schematic designator R60)
R44 "Res" R_0603 -0.875,-24.55 r0 top (schematic designator R3)
R45 "Res" R_0603 -26.7,-24.95 r0 top (schematic designator R36)
R46 "Res" R_0603 53,-25.4 r180 top (schematic designator R36)
R47 "Res" R_0603 60.495,-26.3 r90 top (schematic designator R4)
R48 "Res" R_0603 62.495,-26.3 r90 top (schematic designator R7)
R49 "Res" R_0603 -12.95,-26.05 r0 top (schematic designator R7)
R50 "Res" R_0603 39.25,-26.3 r180 top (schematic designator R4)
R51 "Res" R_0603 -26.7,-26.65 r0 top (schematic designator R3)
R52 "Res" R_0603 -51.625,-30.8 r180 top (schematic designator R64)
R53 "Res" R_0603 -13.725,-32.3 r180 top (schematic designator R3)
R54 "Res" R_0603 -27.475,-32.9 r180 top (schematic designator R7)
R55 "Res" R_0603 -34.41,-33.075 r180 top (schematic designator R6)
R56 "Res" R_0603 -37.41,-33.075 r0 top (schematic designator R48)
R57 "Res" R_0603 8.3,-33.6 r180 top (schematic designator R8)
R58 "Res" R_0603 -13.725,-34 r180 top (schematic designator R36)
R59 "Res" R_0603 -27.475,-34.9 r180 top (schematic designator R4)
R60 "Res" R_0603 61.395,-40.05 r90 top (schematic designator R36)
R61 "Res" R_0603 63.095,-40.05 r90 top (schematic designator R3)
R62 "Res" R_0603 -15.25,-41.5 r180 top (schematic designator R32)
R63 "Res" R_0603 -11.75,-42.5 r270 top (schematic designator R23)
R64 "Res" R_0603 62.25,-43.25 r0 top (schematic designator R19)
R65 "Res" R_0603 -11.75,-45.5 r270 top (schematic designator R5)
R66 "Res" R_0603 7.05,-46.1 r90 top (schematic designator R40)
R67 "Res" R_0603 -11.25,-48 r180 top (schematic designator R1)
S1 "RST" SPST_4DIP -31.875,14.925 r270 top
S2 "RST" SPST_4DIP 21.5,14.275 r270 top (schematic designator S1)
S3 "RST" SPST_4DIP -5.5,14.275 r270 top (schematic designator S1)
S4 "RST" SPST_4DIP 48.5,14.275 r270 top (schematic designator S1)
U1 "TXB0108" TSOP65P640X120-20N 25.004,31.025 r90 top (schematic designator U11)
U2 "TXB0108" TSOP65P640X120-20N -45.95,30.9 r90 top (schematic designator U11)
U3 "TXB0108" TSOP65P640X120-20N -10.2,30.9 r90 top (schematic designator U11)
U4 "MAX3161" DB024 41.304,29.95 r180 top (schematic designator U3)
U5 "MAX3161" DB024 -29.65,29.9 r180 top (schematic designator U3)
U6 "MAX3161" DB024 6.1,29.825 r180 top (schematic designator U3)
U7 "STM32F415RG" LQFP64 -41.195,1.925 r180 top (schematic designator U19)
U8 "STM32F415RG" LQFP64 -14.195,1.925 r180 top (schematic designator U19)
U9 "STM32F415RG" LQFP64 12.805,1.925 r180 top (schematic designator U19)
U10 "STM32F415RG" LQFP64 39.805,1.925 r180 top (schematic designator U19)
U11 "HCPL-0631" SO8_M 7.225,-23.55 r0 top (schematic designator U6)
U12 "HCPL-0631" SO8_M 44.9,-24.7 r180 top (schematic designator U6)
U13 "HCPL-0631" SO8_M -18.6,-25.65 r0 top (schematic designator U6)
U14 "LM1117IMP-3.3" MP04A_L 23.825,-28.45 r180 top (schematic designator U15)
U15 "MAX3161" DB024 -59.725,-29.6 r0 top (schematic designator U3)
U16 "TXB0108" TSOP65P640X120-20N -43.425,-30.6 r270 top (schematic designator U11)
U17 "HCPL-0631" SO8_M 62.095,-31.95 r90 top (schematic designator U6)
U18 "DCP020505" SOP127P1020X280-28M 40.7,-39.7 r180 top (schematic designator U7)
U19 "HCPL-0631" SO8_M -21.825,-33.3 r180 top (schematic designator U6)
U20 "FT4232H" LQFP64_M -0.9,-38.65 r180 top (schematic designator U1)
U21 "LM1117IMP-3.3" MP04A_L 53.45,-35.65 r270 top (schematic designator U12)
U22 "93LC46B/SN" SOIC-SN8_N -16.5,-45.5 r180 top (schematic designator U20)
Y1 "Murata XTAL" XTAL16MHz -31.375,-0.575 r90 top (schematic designator Y2)
Y2 "Murata XTAL" XTAL16MHz -4.375,-0.575 r90 top
Y3 "Murata XTAL" XTAL16MHz 22.625,-0.575 r90 top (schematic designator Y2)
Y4 "Murata XTAL" XTAL16MHz 49.625,-0.575 r90 top (schematic designator Y2)
Y5 "SMD XTAL" QUARTZ_0532_MJ 15.475,-47.65 r90 top (schematic designator Y1)

## Footprints (in the part's own frame and the unit in brackets; to place one, negate y for a bottom-side part, rotate by r counter-clockwise, add the part's x,y. Pads: shape width x height; smd on the part's side, far side on the other; paste and mask are expansions set on the pad)
C_0603 [mm] "Chip Capacitor; Body 1.6 x 0.8 mm (LxW typ)"
  rect 0.8x0.8 smd: 1(-0.75,0) 2(0.75,0)
  silkscreen extent -1.4,-0.7 1.4,0.7, body extent -0.8,-0.4 0.8,0.4, height 0.3
DB024 [mm] "SSOP, Plastic; 24 Leads; Body Width 5.3 mm; Pitch 0.65 mm"
  rect 0.4x2.15 smd: 1(-3.575,-3.275) 2(-2.925,-3.275) 3(-2.275,-3.275) 4(-1.625,-3.275) 5(-0.975,-3.275) 6(-0.325,-3.275) 7(0.325,-3.275) 8(0.975,-3.275) 9(1.625,-3.275) 10(2.275,-3.275) 11(2.925,-3.275) 12(3.575,-3.275) 13(3.575,3.275) 14(2.925,3.275) 15(2.275,3.275) 16(1.625,3.275) 17(0.975,3.275) 18(0.325,3.275) 19(-0.325,3.275) 20(-0.975,3.275) 21(-1.625,3.275) 22(-2.275,3.275) 23(-2.925,3.275) 24(-3.575,3.275)
  silkscreen extent -4.45,-3.4 4.25,1.8
DSUB1.385-2H9M [mm] "Connector; D Subminiature; 9 Position; Right Angle; Pitch 1.385 mm"
  rect 1.69x1.69 hole 1.09: 1(5.54,-10.92)
  round 1.69 hole 1.09: 2(2.77,-10.92) 3(0,-10.92) 4(-2.77,-10.92) 5(-5.54,-10.92) 6(4.155,-8.08) 7(1.385,-8.08) 8(-1.385,-8.08) 9(-4.155,-8.08)
  round 4.76 hole 3.26: 10(-12.495,-9.5) 11(12.495,-9.5)
  silkscreen extent -15.4,-12.4 15.4,6
HDR1X2 [mm] "Connector; Header; 2 Position"
  rect 1.5x1.5 hole 0.9: 1(0,0)
  round 1.5 hole 0.9: 2(2.54,0)
  silkscreen extent -1.27,-1.27 3.81,1.27
HDR1X4 [mm] "Connector; Header; 4 Position"
  rect 1.5x1.5 hole 0.9: 1(0,0)
  round 1.5 hole 0.9: 2(2.54,0) 3(5.08,0) 4(7.62,0)
  silkscreen extent -1.27,-1.27 8.89,1.27
L_0805 [mm] "Inductor Pattern"
  rect 0.9x1.3 smd: 1(-0.95,0) 2(0.95,0)
  silkscreen extent -1.6,-0.95 1.6,0.95, body extent -1,-0.6 1,0.6, height 0.96
"Led, 2.54mm pitch" [mm]
  rect 1.2x1.2 hole 0.7: 1(2.54,0)
  round 1.2 hole 0.7: 2(0,0)
  silkscreen extent -1.23,-2.5 3.56,2.5
LQFP64 [mm] "Thin QFP, 64-Leads, Body 10x10mm, Pitch 0.5mm, IPC Low Density"
  oval 2.1x0.3 smd: 1(-5.6,3.75) 2(-5.6,3.25) 3(-5.6,2.75) 4(-5.6,2.25) 5(-5.6,1.75) 6(-5.6,1.25) 7(-5.6,0.75) 8(-5.6,0.25) 9(-5.6,-0.25) 10(-5.6,-0.75) 11(-5.6,-1.25) 12(-5.6,-1.75) 13(-5.6,-2.25) 14(-5.6,-2.75) 15(-5.6,-3.25) 16(-5.6,-3.75) 33(5.6,-3.75) 34(5.6,-3.25) 35(5.6,-2.75) 36(5.6,-2.25) 37(5.6,-1.75) 38(5.6,-1.25) 39(5.6,-0.75) 40(5.6,-0.25) 41(5.6,0.25) 42(5.6,0.75) 43(5.6,1.25) 44(5.6,1.75) 45(5.6,2.25) 46(5.6,2.75) 47(5.6,3.25) 48(5.6,3.75)
  oval 0.3x2.1 smd: 17(-3.75,-5.6) 18(-3.25,-5.6) 19(-2.75,-5.6) 20(-2.25,-5.6) 21(-1.75,-5.6) 22(-1.25,-5.6) 23(-0.75,-5.6) 24(-0.25,-5.6) 25(0.25,-5.6) 26(0.75,-5.6) 27(1.25,-5.6) 28(1.75,-5.6) 29(2.25,-5.6) 30(2.75,-5.6) 31(3.25,-5.6) 32(3.75,-5.6) 49(3.75,5.6) 50(3.25,5.6) 51(2.75,5.6) 52(2.25,5.6) 53(1.75,5.6) 54(1.25,5.6) 55(0.75,5.6) 56(0.25,5.6) 57(-0.25,5.6) 58(-0.75,5.6) 59(-1.25,5.6) 60(-1.75,5.6) 61(-2.25,5.6) 62(-2.75,5.6) 63(-3.25,5.6) 64(-3.75,5.6)
  silkscreen extent -5.72,-4.15 4.15,4.57, body extent -6,-6 6,6, height 1.6
LQFP64_M [mm] "Thin QFP, 64-Leads, Body 10x10mm, Pitch 0.5mm, IPC Low Density"
  oval 2.1x0.3 smd: 1(-5.6,3.75) 2(-5.6,3.25) 3(-5.6,2.75) 4(-5.6,2.25) 5(-5.6,1.75) 6(-5.6,1.25) 7(-5.6,0.75) 8(-5.6,0.25) 9(-5.6,-0.25) 10(-5.6,-0.75) 11(-5.6,-1.25) 12(-5.6,-1.75) 13(-5.6,-2.25) 14(-5.6,-2.75) 15(-5.6,-3.25) 16(-5.6,-3.75) 33(5.6,-3.75) 34(5.6,-3.25) 35(5.6,-2.75) 36(5.6,-2.25) 37(5.6,-1.75) 38(5.6,-1.25) 39(5.6,-0.75) 40(5.6,-0.25) 41(5.6,0.25) 42(5.6,0.75) 43(5.6,1.25) 44(5.6,1.75) 45(5.6,2.25) 46(5.6,2.75) 47(5.6,3.25) 48(5.6,3.75)
  oval 0.3x2.1 smd: 17(-3.75,-5.6) 18(-3.25,-5.6) 19(-2.75,-5.6) 20(-2.25,-5.6) 21(-1.75,-5.6) 22(-1.25,-5.6) 23(-0.75,-5.6) 24(-0.25,-5.6) 25(0.25,-5.6) 26(0.75,-5.6) 27(1.25,-5.6) 28(1.75,-5.6) 29(2.25,-5.6) 30(2.75,-5.6) 31(3.25,-5.6) 32(3.75,-5.6) 49(3.75,5.6) 50(3.25,5.6) 51(2.75,5.6) 52(2.25,5.6) 53(1.75,5.6) 54(1.25,5.6) 55(0.75,5.6) 56(0.25,5.6) 57(-0.25,5.6) 58(-0.75,5.6) 59(-1.25,5.6) 60(-1.75,5.6) 61(-2.25,5.6) 62(-2.75,5.6) 63(-3.25,5.6) 64(-3.75,5.6)
  silkscreen extent -5.72,-4.15 4.15,4.57, body extent -5,-5 5,5, height 1.6
MP04A_L [mm] "SOT223, 4-Leads, Body 6.5x3.5mm, Pitch 2.3mm, Lead Span 7mm, IPC High Density"
  rect 2.1x0.9 smd: 1(-2.85,2.3) 2(-2.85,0) 3(-2.85,-2.3)
  rect 2.1x3.2 smd: 4(2.85,0)
  silkscreen extent -2.98,-3.35 1.5,3.42, body extent -1.85,-3.35 1.85,3.35, height 1.8
PAS [mil]
  round 60 hole 30: 1(0,0) 2(0,137.79)
  silkscreen extent -59,-59 118,197
QUARTZ_0532_MJ [mm]
  rect 1.3x1.2 smd: 1(0,0)
  rect 1.3x1.15 smd: 2(0,3.8) 3(2.3,3.8) 4(2.3,0)
  silkscreen extent -0.5,-1.2 2.9,5.1
R_0603 [mm] "Chip Capacitor; Body 1.6 x 0.8 mm (LxW typ)"
  rect 0.6x0.9 smd: 1(-0.75,0) 2(0.75,0)
  silkscreen extent -1.3,-0.7 1.3,0.7, body extent -0.8,-0.41 0.8,0.41, height 0.45
SO8_M [mm] "SOIC, 8-Leads, Body 4.9x3.9mm, Pitch 1.27mm, IPC Low Density"
  oval 2.5x0.7 smd: 1(-2.45,1.905) 2(-2.45,0.635) 3(-2.45,-0.635) 4(-2.45,-1.905) 5(2.45,-1.905) 6(2.45,-0.635) 7(2.45,0.635) 8(2.45,1.905)
  silkscreen extent -2.57,-2.5 0.8,2.93, body extent -2,-2.5 2,2.5, height 1.75
SO-8_N [mm] "SOIC, 8-Leads, Body 4.9x3.9mm, Pitch 1.27mm, IPC Medium Density"
  oval 2.2x0.6 smd: 1(-2.4,1.905) 2(-2.4,0.635) 3(-2.4,-0.635) 4(-2.4,-1.905) 5(2.4,-1.905) 6(2.4,-0.635) 7(2.4,0.635) 8(2.4,1.905)
  silkscreen extent -2.52,-2.5 0.9,2.88, body extent -2,-2.5 2,2.5, height 1.75
SOIC-SN8_N [mm] "SOIC, 8-Leads, Body 4.9x3.8mm, Pitch 1.27mm, IPC Medium Density"
  oval 2.2x0.6 smd: 1(-2.4,1.905) 2(-2.4,0.635) 3(-2.4,-0.635) 4(-2.4,-1.905) 5(2.4,-1.905) 6(2.4,-0.635) 7(2.4,0.635) 8(2.4,1.905)
  silkscreen extent -2.53,-2.5 0.9,2.88, body extent -2,-2.5 2,2.5, height 1.75
SOP127P1020X280-28M [mm] "SOP, 28-Leads, Body 18,0x8,0mm (max), Pitch 1,27mm, IPC Low Density"
  rect 2x0.85 smd: 1(-4.875,8.255) 2(-4.875,6.985) 3(-4.875,5.715) 12(-4.875,-5.715) 13(-4.875,-6.985) 14(-4.875,-8.255) 15(4.875,-8.255) 16(4.875,-6.985) 17(4.875,-5.715) 26(4.875,5.715) 27(4.875,6.985) 28(4.875,8.255)
  silkscreen extent -5,-9 3.47,9.35, body extent -4,-9 4,9, height 2.8
SOT23_N [mm] "SOT23, 3-Leads, Body 2.9x1.3mm, Pitch 0.95mm, Lead Span 2.3mm, IPC Medium Density"
  rect 1.3x0.6 smd: 1(-1.05,0.95) 2(-1.05,-0.95) 3(1.05,0)
  silkscreen extent -1.17,-1.5 0.7,1.92, body extent -0.7,-1.5 0.7,1.5, height 1.1
SOT-23_N [mm] "SOT23, 3-Leads, Body 2.9x1.3mm, Pitch 0.95mm, Lead Span 2.5mm, IPC Medium Density"
  rect 1.15x0.6 smd: 1(-1.125,0.95) 2(-1.125,-0.95) 3(1.125,0)
  silkscreen extent -1.25,-1.5 0.7,1.92, body extent -0.7,-1.5 0.7,1.5, height 1.1
SPST_4DIP [mm]
  rect 2.3x1.1 smd: 1(-0.2,0) 2(5.2,0)
  silkscreen extent -0.5,-1.5 5.5,1.5
SW_SPDT [mm]
  rect 1x1 smd: 1(-1.5,0) 2(0,0) 3(1.5,0)
  Top Layer region: -0.5,0.5 -0.7,0 -0.5,-0.5
  Top Layer region: 0.5,0.5 0.7,0 0.5,-0.5
  Top Layer region: -0.8,0.5 -1,0 -0.8,-0.5 -1,-0.5 -1,0.5
  Top Layer region: 0.8,0.5 1,0 0.8,-0.5 1,-0.5 1,0.5
TSOP65P640X120-20N [mm] "TSOP, 20-Leads, Body 6,6x4,5mm (max), Pitch 0,65mm, IPC Medium Density"
  rect 1.7x0.35 smd: 1(-2.85,2.925) 2(-2.85,2.275) 3(-2.85,1.625) 4(-2.85,0.975) 5(-2.85,0.325) 6(-2.85,-0.325) 7(-2.85,-0.975) 8(-2.85,-1.625) 9(-2.85,-2.275) 10(-2.85,-2.925) 11(2.85,-2.925) 12(2.85,-2.275) 13(2.85,-1.625) 14(2.85,-0.975) 15(2.85,-0.325) 16(2.85,0.325) 17(2.85,0.975) 18(2.85,1.625) 19(2.85,2.275) 20(2.85,2.925)
  silkscreen extent -2.97,-3.3 1.6,3.77, body extent -2.25,-3.3 2.25,3.3, height 1.2
USBB [mm] "USB Mother connector"
  round 1.5 hole 0.92: 1(1.25,0) 2(-1.25,0) 3(-1.25,-2) 4(1.25,-2)
  round 3.5 hole 2.3: 5(-6.02,-4.71) 5(6.02,-4.71)
  silkscreen extent -6.02,-15 6.02,1
XTAL16MHz [mm]
  rect 0.4x2 smd: 1(0,0) 2(1.2,0) 3(2.4,0)
  silkscreen extent -0.4,-1.2 2.8,1.2

## Part data
C1 C2 C3 C4 C5 C6 C7 C8 C9 C10 C11 C12 C13 C14 C15 C16 C17 C18 C19 C20 C21 C22 C23 C24 C25 C26 C27 C28 C29 C30 C31 C32 C33 C34 C35 C36 C37 C38 C39 C40 C41 C42 C43 C44 C45 C46 C47 C48 C49 C51 C52 C64: library part C0603, "Capacitor"
C50 C53 C54 C56 C62: library part "Cap Semi", "Capacitor"
C55 C57 C58 C59 C60 C61 C63 C65 C66 C67 C68 C69 C70 C71 C72 C73 C74 C75 C76 C77 C78 C79: "Capacitor"
D1 D2 D3 D16: library part "D Schottky", "Schottky Diode"
D4 D5 D6 D7 D8 D9 D10 D11 D12 D13 D14 D15: library part LED0, "Typical INFRARED GaAs LED"
J1 J2 J3 J5: library part "D Connector 9", "DSUB9 Male connector"
J4: "USB-B connector"
P1 P2 P3 P4 P5 P6 P7 P12 P13 P14 P15 P16: library part "Header 2H", "Header, 2-Pin, 2.54mm pitch"
P8 P9 P10 P11: library part "Header 4H", "Header, 4-Pin, 2.54mm pitch"
P17: library part "Header 2", "Header, 2-Pin, 3.5mm pitch"
P18 P19 P20 P21 P22 P23 P24 P25 P26 P27 P28 P29: "Soldering switch"
Q1 Q2 Q3 Q12: "HEXFET Power MOSFET"
Q4 Q5 Q6 Q7 Q8 Q9 Q10 Q11: "P-channel Enhancement Mode Vertical D-MOSFET"
R1 R2 R3 R4 R5 R6 R7 R8 R9 R10 R11 R12 R13 R14 R15 R16 R17 R18 R19 R20 R21 R22 R23 R24 R25 R26 R27 R28 R29 R30 R31 R32 R33 R34 R35 R38 R43 R52 R55 R56: library part Res2, "Resistor"
R36 R37 R39 R40 R41 R42 R44 R45 R46 R47 R48 R49 R50 R51 R53 R54 R57 R58 R59 R60 R61 R62 R63 R64 R65 R66 R67: library part Res3, "Resistor"
S1 S2 S3 S4: library part SW-PB, "Reset button"
U1 U2 U3 U16: "SPI buffer"
U4 U5 U6 U15: "Multitrancivier"
U7 U8 U9 U10: "ST ARM MC"
U11 U12 U13 U17 U19: "Optocoupler, dual"
U14 U21: "800mA Low-Dropout Linear Regulator"
U18: "Power galvanic isolation"
U20: "USR to RS232 transceiver"
U22: "1K, 64x16-bit, 2.5V Microwire Serial EEPROM, 8-Pin SOIC 150mil, Commercial Temperature"
Y1 Y2 Y3 Y4: library part Murata_XTAL, "Murata 16 MHz XTAL"
Y5: library part XTAL, "0532 12MHz XTAL"

## Free pads (board coordinates)
  round 4.5 hole 2.6: 0(-55,-42.5) 0(-55,42.5) 0(55,-42.5) 0(55,42.5)

## Via types
v1: diameter 0.8, hole 0.3, Top Layer to Bottom Layer, 433 vias
v2: diameter 1, hole 0.5, Top Layer to Bottom Layer, 10 vias